# EAGLE board Weathering System (EAGLE 9.7.0)

Size 100 x 80 mm. Coordinates in mm from the lower left corner, seen from the top.
Outline: 0,0 100,0 100,80 0,80 0,0
Copper layers (1*16): Top 0.035mm / dielectric 1.5mm / Bottom 0.035mm
Design rules "default": minimum track width 6mil, minimum drill 0.35mm, track to track 6mil, track to pad 6mil, pad to pad 6mil, via to via 6mil, smd to smd 6mil, copper to edge 40mil, drill to drill 6mil, minimum pad ring 10mil, minimum via ring 8mil, stop-mask expansion 4mil, vias tented up to drill 0mil, thermal gap 10mil

## Footprints (pad centres in the part's own frame; a part is rotated, then mirrored left to right if it is on the bottom)
MQ-XX-SOCKET = drill 1.27: 1 -6.223,6.223; 2 -8.788,0; 3 -6.223,-6.223; 4 6.223,-6.223; 5 8.788,0; 6 6.223,6.223
RESAD1016W63L850D250B = drill 0.83 pad 1.43: 1 -5.08,0; 2 5.08,0
1X02 = drill 1.016 long: 1 -1.27,0; 2 1.27,0
GL5528 = drill 0.8 pad 1.4: 1 -1.702,0; 2 1.702,0
HA-06-SM065 = drill 1 pad 1.676: 1 -2.54,-2.54; 2 0,2.54; 3 2.54,-2.54
ARDUINO-UNO-R3-SHIELD = drill 1.016 pad 1.88: 3.3V 24.13,-2.54; 5V 24.13,0; A0 24.13,12.7; A1 24.13,15.24; A2 24.13,17.78; A3 24.13,20.32; A4 24.13,22.86; A5 24.13,25.4; AREF -24.13,-13.97; D2 -24.13,20.32; D3 -24.13,17.78; D4 -24.13,15.24; D5 -24.13,12.7; D6 -24.13,10.16; D7 -24.13,7.62; D8 -24.13,3.81; D9 -24.13,1.27; D10 -24.13,-1.27; D11 -24.13,-3.81; D12 -24.13,-6.35; D13 -24.13,-8.89; GND@0 24.13,2.54; GND@1 24.13,5.08; GND@2 -24.13,-11.43; IOREF 24.13,-7.62; NC 24.13,-10.16; RES 24.13,-5.08; RX -24.13,25.4; SCL -24.13,-19.05; SDA -24.13,-16.51; TX -24.13,22.86; VIN 24.13,7.62
TO92 = drill 0.813 octagon: 1 -1.27,0; 2 0,1.905; 3 1.27,0
1X08 = drill 1.016 long: 1 -8.89,0; 2 -6.35,0; 3 -3.81,0; 4 -1.27,0; 5 1.27,0; 6 3.81,0; 7 6.35,0; 8 8.89,0

## Placement (x,y rotation side)
GAS1  GAS-SENSORMQ-XX-SOCKET  [MQ-XX-SOCKET]  117.9,16.45 270 top  (outside the outline)
R1  1k  [RESAD1016W63L850D250B]  168.92,166.98 270 top  (outside the outline)
R2  1k  [RESAD1016W63L850D250B]  168.92,156.82 270 top  (outside the outline)
R3  FORCE-SENSOR  [1X02]  7.6,18.88 0 top
R4  1k  [RESAD1016W63L850D250B]  133.63,8.97 90 top  (outside the outline)
R5  1k  [RESAD1016W63L850D250B]  6.33,13.8 90 top
R6  PHOTOCELL_GL5528  [GL5528]  106.21,75.16 0 top  (outside the outline)
R7  1k  [RESAD1016W63L850D250B]  104.94,65 90 top  (outside the outline)
RPOT1  250k  [HA-06-SM065]  84.62,75.16 0 top
U1  ARDUINO-UNO-R3-SHIELD  [ARDUINO-UNO-R3-SHIELD]  101.66,177.49 270 top  (outside the outline)
U2  TMP36GT9Z_TO92  [TO92]  195.84,94.03 0 top  (outside the outline)
U3  PINHD-1X08_1X08M  [1X08]  189.7,202.88 0 top  (outside the outline)

## Library data of the parts
GAS1 R1-R7 RPOT1 U1-U3 = Tinkercad

## Nets
U1_5V: GAS1.1 GAS1.2 GAS1.3 R3.2 R6.2 RPOT1.3 U1.5V U2.3
U1_A0: U1.A0 U2.2
U1_A1: R3.1 R5.2 U1.A1
U1_A2: GAS1.4 GAS1.6 R4.2 U1.A2
U1_A3: R6.1 R7.2 U1.A3
U1_A4: RPOT1.2 U1.A4
U1_TX: R1.1 U1.TX
U3_2: GAS1.5 R2.2 R4.1 R5.1 R7.1 RPOT1.1 U1.GND@0 U1.GND@1 U1.GND@2 U2.1 U3.2
U3_3: U1.RX U3.3
U3_5: U1.3.3V U3.1 U3.4 U3.5
U3_8: R1.2 R2.1 U3.8

## Tracks (layer width: path | path; a pad name or v marks a point on that pad's centre or on a via)
U1_5V  (7 unrouted)
U1_A0  (1 unrouted)
U1_A1  (2 unrouted)
U1_A2  (3 unrouted)
U1_A3  (2 unrouted)
U1_A4  (1 unrouted)
U1_TX  (1 unrouted)
U3_2  (10 unrouted)
U3_3  (1 unrouted)
U3_5  (3 unrouted)
U3_8  (2 unrouted)